# EAGLE board bbc (EAGLE 9.6.1)
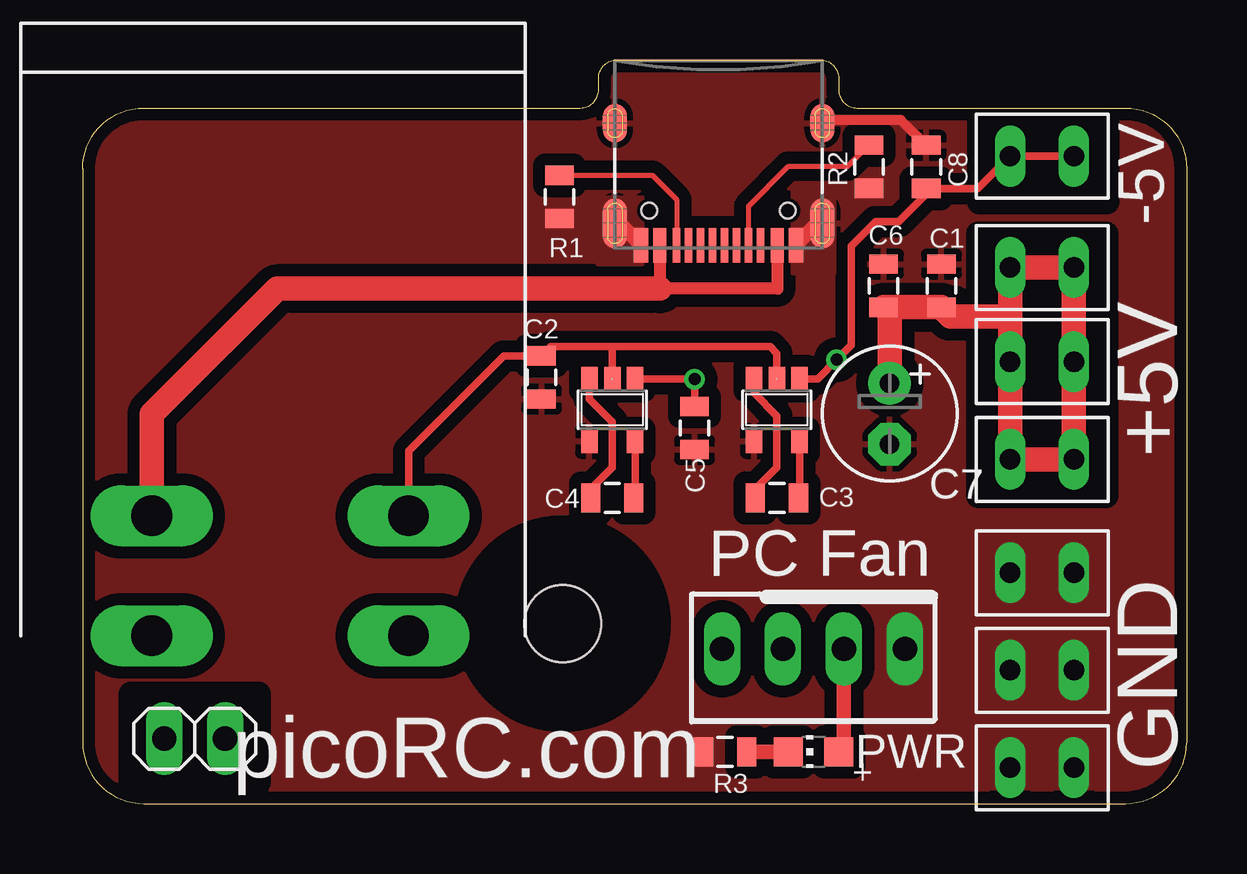
[diagram p0: board, top side]
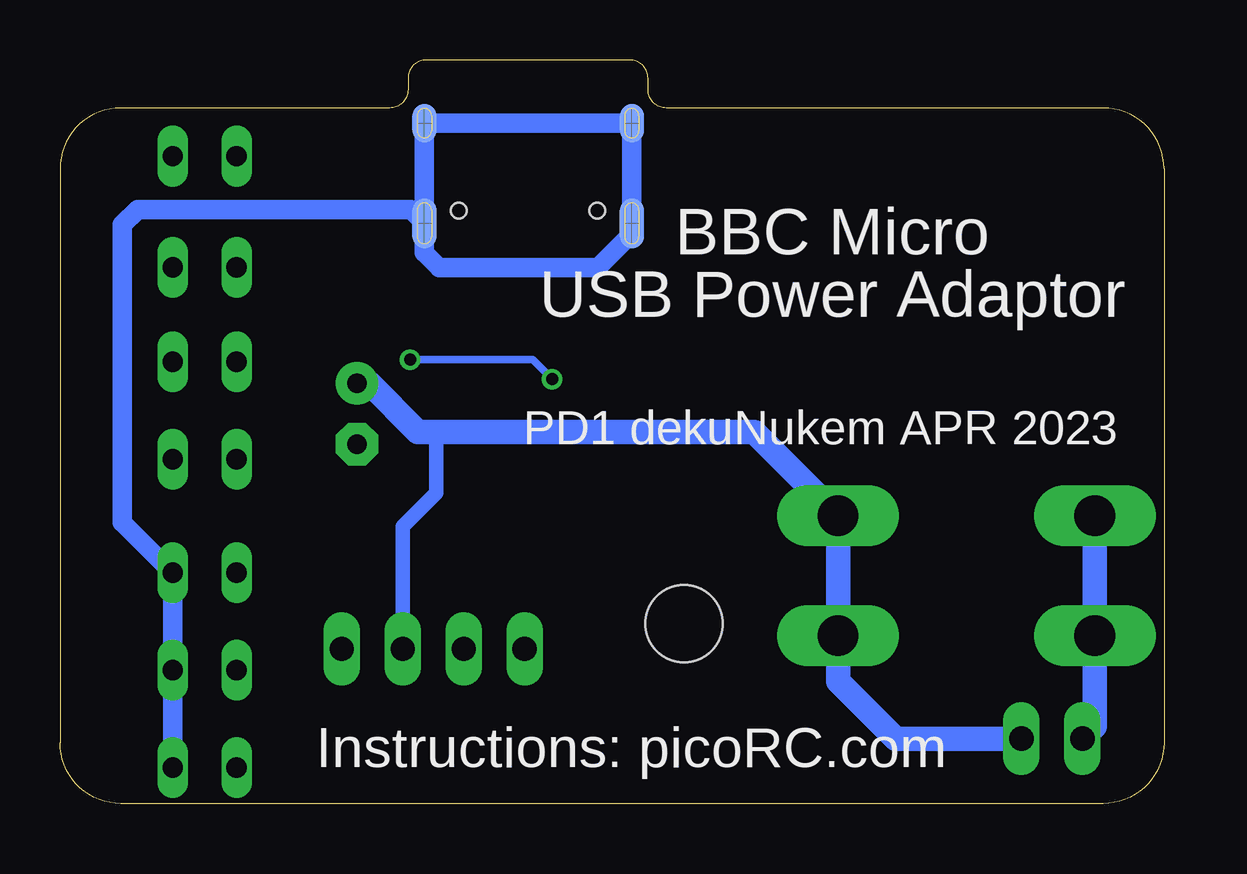
[diagram p1: board, bottom side, seen from below]

Size 46 x 31 mm. Coordinates in mm from the lower left corner, seen from the top.
Outline: 0,26.46 0,2.54 arc90 2.54,0 43.46,0 arc90 46,2.54 46,26.46 arc90 43.46,29 32.26,29 arc-90 31.5,29.76 31.5,30.24 arc90 30.74,31 22.26,31 arc90 21.5,30.24 21.5,29.76 arc-90 20.74,29 2.54,29 arc90 0,26.46
Copper layers (1*16): Top 0.035mm / dielectric 1.5mm / Bottom 0.035mm
Design rules "SparkFun-2-Layer-General-JLCPCB": minimum track width 7mil, minimum drill 0.3mm, track to track 7mil, track to pad 7mil, pad to pad 7mil, via to via 7mil, smd to smd 7mil, copper to edge 7mil, drill to drill 7mil, minimum pad ring 7mil, minimum via ring 7mil, stop-mask expansion 3mil, vias tented up to drill 25mil, thermal gap 10mil
tRestrict: area 16,3.5 to 24,11.5; area 37.3,12.8 to 42.6,23.8; area 37.4,25.1 to 42.7,28.4; area 2,0.9 to 7.3,4.6

## Footprints (pad centres in the part's own frame; a part is rotated, then mirrored left to right if it is on the bottom)
0805@1 = smd 0.8 x 1.2: 1 -0.9,0; 2 0.9,0
E2,5-6 = drill 0.813 pad 1.778: + -1.27,0 | drill 0.813 pad 1.778 octagon: - 1.27,0
USB-C-16P = smd 0.3 x 1.45: A5 -1.25,0; A6 -0.25,0; A7 0.25,0; A8 1.25,0; B5 1.75,0; B6 0.75,0; B7 -0.75,0; B8 -1.75,0 | smd 0.6 x 1.45: GND -3.225,0; GND2 3.225,0 | smd 1 x 2.1: SHLD1 -4.32,-0.915; SHLD2 4.32,-0.915 | smd 1 x 2.1 bottom: SHLD3 -4.32,-0.915; SHLD4 4.32,-0.915 | smd 1 x 1.6: SHLD5 -4.32,-5.095; SHLD8 4.32,-5.095 | smd 1 x 1.6 bottom: SHLD6 -4.32,-5.095; SHLD7 4.32,-5.095 | smd 0.55 x 1.45: VBUS1 -2.45,0; VBUS2 2.45,0 | hole 0.65: -2.89,-1.445; 2.89,-1.445
1X02 = drill 1.016 long: 1 -1.27,0; 2 1.27,0
1X04 = drill 1.016 long: 1 -3.81,0; 2 -1.27,0; 3 1.27,0; 4 3.81,0
CHIP-LED0805 = smd 1.2 x 1.2: A 0,-1.05; C 0,1.05
0805 = smd 0.8 x 1.2: 1 -0.9,0; 2 0.9,0
SOT23-5 = smd 0.69 x 0.99: 1 -0.95,-1.29; 2 0,-1.29; 3 0.95,-1.29; 4 0.95,1.3; 5 -0.95,1.3
ROCK_SWITCH = drill 1.7 long: P$1 -5.05,0; P$2 5.65,0; P$3 -5.05,5; P$4 5.65,5
M3_MOUNTING_HOLE_PACK = hole 3.2: 0,0
2.8BLADE = drill 0.85 long: P$1 -1.33,0; P$2 1.33,0

## Placement (x,y rotation side)
C1  100nF  [0805@1]  35.78,21.59 270 top
C2  1uF  [0805@1]  19.12,17.76 90 top
C3  1uF  [0805@1]  28.92,12.73 180 top
C4  1uF  [0805@1]  22.07,12.73 180 top
C5  2.2uF  [0805@1]  25.5,15.66 270 top
C6  1uF  [0805@1]  33.37,21.59 270 top
C7  [E2,5-6]  33.62,16.26 270 top
C8  100nF  [0805@1]  35.15,26.54 270 top
J4  [USB-C-16P]  26.5,23.27 180 top
JP1  [1X02]  4.67,2.7 180 top
JP3  [1X04]  30.45,6.45 180 top
LED3  [CHIP-LED0805]  30.45,2.16 90 top
R1  5K1  [0805]  19.87,25.29 270 top
R2  5K1  [0805]  32.76,26.54 270 top
R3  5K1  [0805]  26.77,2.16 0 top
U1  TPS60400DVBR  [SOT23-5]  22.07,16.42 180 top
U3  TPS60400DVBR  [SOT23-5]  28.92,16.42 180 top
U$3  ROCK_SW  [ROCK_SWITCH]  7.93,7 0 top
U$4  M3_MOUNTING_HOLE  [M3_MOUNTING_HOLE_PACK]  20,7.5 0 top
U$5  BLADE28  [2.8BLADE]  39.97,26.99 0 top
U$6  BLADE28  [2.8BLADE]  39.97,22.35 0 top
U$7  BLADE28  [2.8BLADE]  39.97,18.42 0 top
U$8  BLADE28  [2.8BLADE]  39.97,14.35 0 top
U$9  BLADE28  [2.8BLADE]  39.97,9.62 0 top
U$10  BLADE28  [2.8BLADE]  39.97,5.56 0 top
U$11  BLADE28  [2.8BLADE]  39.97,1.49 0 top

## Library data of the parts
C1-C6 C8 = clock
C7 LED3 = adafruit
J4 = SparkFun-Connectors; PROD_ID: CONN-14122
JP1 = pinhead
JP3 = appleii
R1-R3 = atx_power_control
U1 U3 = TPS6040x; DIST: FARNELL; MOQ: 3000; SMD_MARKING: PFKI
U$3 = atx4vc
U$4 = a
U$5-U$11 = blade

## Nets
+5V: C1.2 C2.2 C6.2 C7.+ JP1.1 JP3.2 LED3.A U1.2 U3.2 U$3.P$2 U$3.P$4 U$6.P$1 U$6.P$2 U$7.P$1 U$7.P$2 U$8.P$1 U$8.P$2
-5V: C5.1 C8.2 U1.1 U3.1 U$5.P$1 U$5.P$2
GND: C1.1 C2.1 C5.2 C6.1 C7.- C8.1 J4.GND J4.GND2 J4.SHLD1 J4.SHLD2 J4.SHLD3 J4.SHLD4 J4.SHLD5 J4.SHLD6 J4.SHLD7 J4.SHLD8 JP3.1 R1.2 R2.2 R3.1 U1.4 U3.4 U$9.P$1 U$9.P$2 U$10.P$1 U$10.P$2 U$11.P$1 U$11.P$2
N$1: J4.VBUS1 J4.VBUS2 JP1.2 U$3.P$1 U$3.P$3
N$2: C3.2 U3.3
N$3: C3.1 U3.5
N$4: C4.2 U1.3
N$5: C4.1 U1.5
N$6: J4.A5 R2.1
N$7: LED3.C R3.2
N$31: J4.B5 R1.1

## Tracks (layer width: path | path; a pad name or v marks a point on that pad's centre or on a via)
+5V
  Top 0.305: U$3.P$4 13.58,14.7 17.54,18.66 C2.2 19.51,19.05 22.09,19.05 | 22.09,19.05 28.65,19.05 28.92,18.77 U3.2 | U1.2 22.07,19.02 22.09,19.05
  Top 0.61: JP3.2 31.72,2.38 LED3.A
  Top 1.016: C7.+ 33.62,20.44 C6.2 C1.2 36.16,20.31 38.64,20.31 | 38.64,20.31 U$6.P$1 U$6.P$2 U$7.P$2 U$8.P$2 U$8.P$1 U$7.P$1 38.64,20.31
  Bottom 0.61: JP3.2 31.72,11.56 30.32,12.95 30.32,15.49
  Bottom 1.016: C7.+ 33.12,17.53 31.08,15.49 30.32,15.49 17.07,15.49 U$3.P$4 U$3.P$2 13.58,5.1 11.18,2.7 JP1.1
-5V  (via drill 0.5)
  Top 0.305: U3.1 30.62,17.71 v31.41,18.5 32.02,19.11 32.02,23.24 33.04,24.26 34.01,24.26 35.15,25.4 C8.2 37.3,25.64 U$5.P$1 U$5.P$2 | U1.1 25.48,17.71 v25.5,17.69 C5.1
  Bottom 0.305: v31.41,18.5 26.31,18.5 v25.5,17.69
GND
  Top 0.406: J4.SHLD6 30.94,28.5 34.1,28.5 C8.1
  Top 0.61: J4.GND2 22.36,24.19 J4.SHLD4 | J4.GND 30.64,24.19 J4.SHLD1
  Bottom 0.813: J4.SHLD1 31.39,24.77 42.77,24.77 43.4,24.13 43.4,11.72 U$9.P$2 U$10.P$2 U$11.P$2 | J4.SHLD1 30.82,22.97 30.2,22.35 23.59,22.35 22.18,23.77 J4.SHLD4 J4.SHLD8 J4.SHLD6 J4.SHLD1
  pour Top (isolate 0.508): 46,34.08 0,34.08 0,-0.06 46,-0.02
  pour Top (no thermals): 37.31,11.43 42.77,11.43 42.77,0.64 37.31,0.64
  pour Top (no thermals): 29.56,25.53 31.34,25.53 31.34,22.1 29.56,22.1
  pour Top (no thermals): 21.43,25.27 21.43,22.48 23.34,22.48 23.34,25.27
N$1
  Top 0.508: J4.VBUS2 24.05,21.46 28.95,21.46 J4.VBUS1
  Top 1.016: 24.05,21.46 8.1,21.46 2.88,16.25 U$3.P$3
  Bottom 1.016: U$3.P$3 U$3.P$1 2.88,3.22 JP1.2
N$2
  Top 0.305: U3.3 27.98,17.11 28.92,16.16 28.92,14.02 28.02,13.12 C3.2
N$3
  Top 0.305: U3.5 29.88,12.79 C3.1
N$4
  Top 0.305: U1.3 21.12,16.86 22.07,15.91 22.07,14.02 21.17,13.12 C4.2
N$5
  Top 0.305: U1.5 23.02,12.79 C4.1
N$6
  Top 0.203: J4.A5 27.75,24.91 29.41,26.57 31.89,26.57 R2.1
N$7
  Top 0.61: LED3.C R3.2
N$31
  Top 0.203: J4.B5 24.75,25.18 23.74,26.19 R1.1

## Text on the board
tNames: -5V | +5V | PC Fan | GND | picoRC.com | PWR
bNames: BBC Micro / USB Power Adaptor | PD1 dekuNukem APR 2023 | Instructions: picoRC.com